# EAGLE board SpaceInvaders-v21-OtherMill (EAGLE 8.1.0)
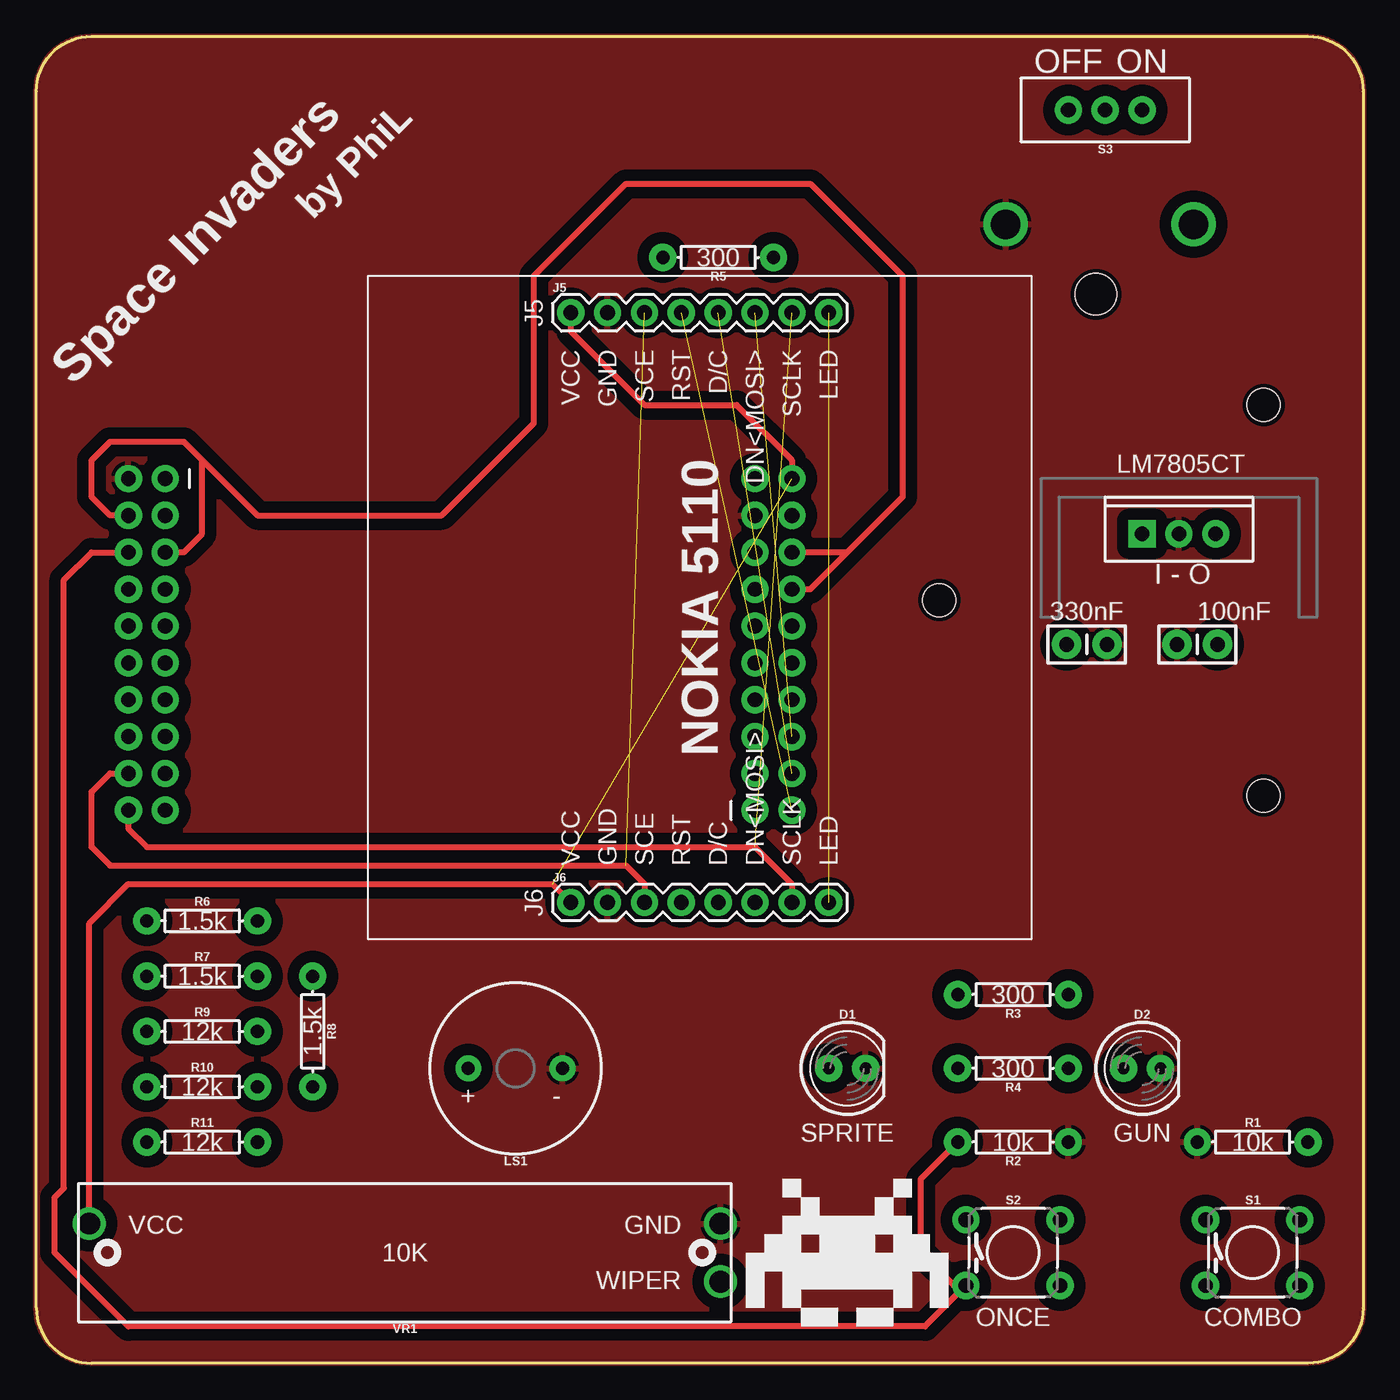
[diagram p0: board, top side]
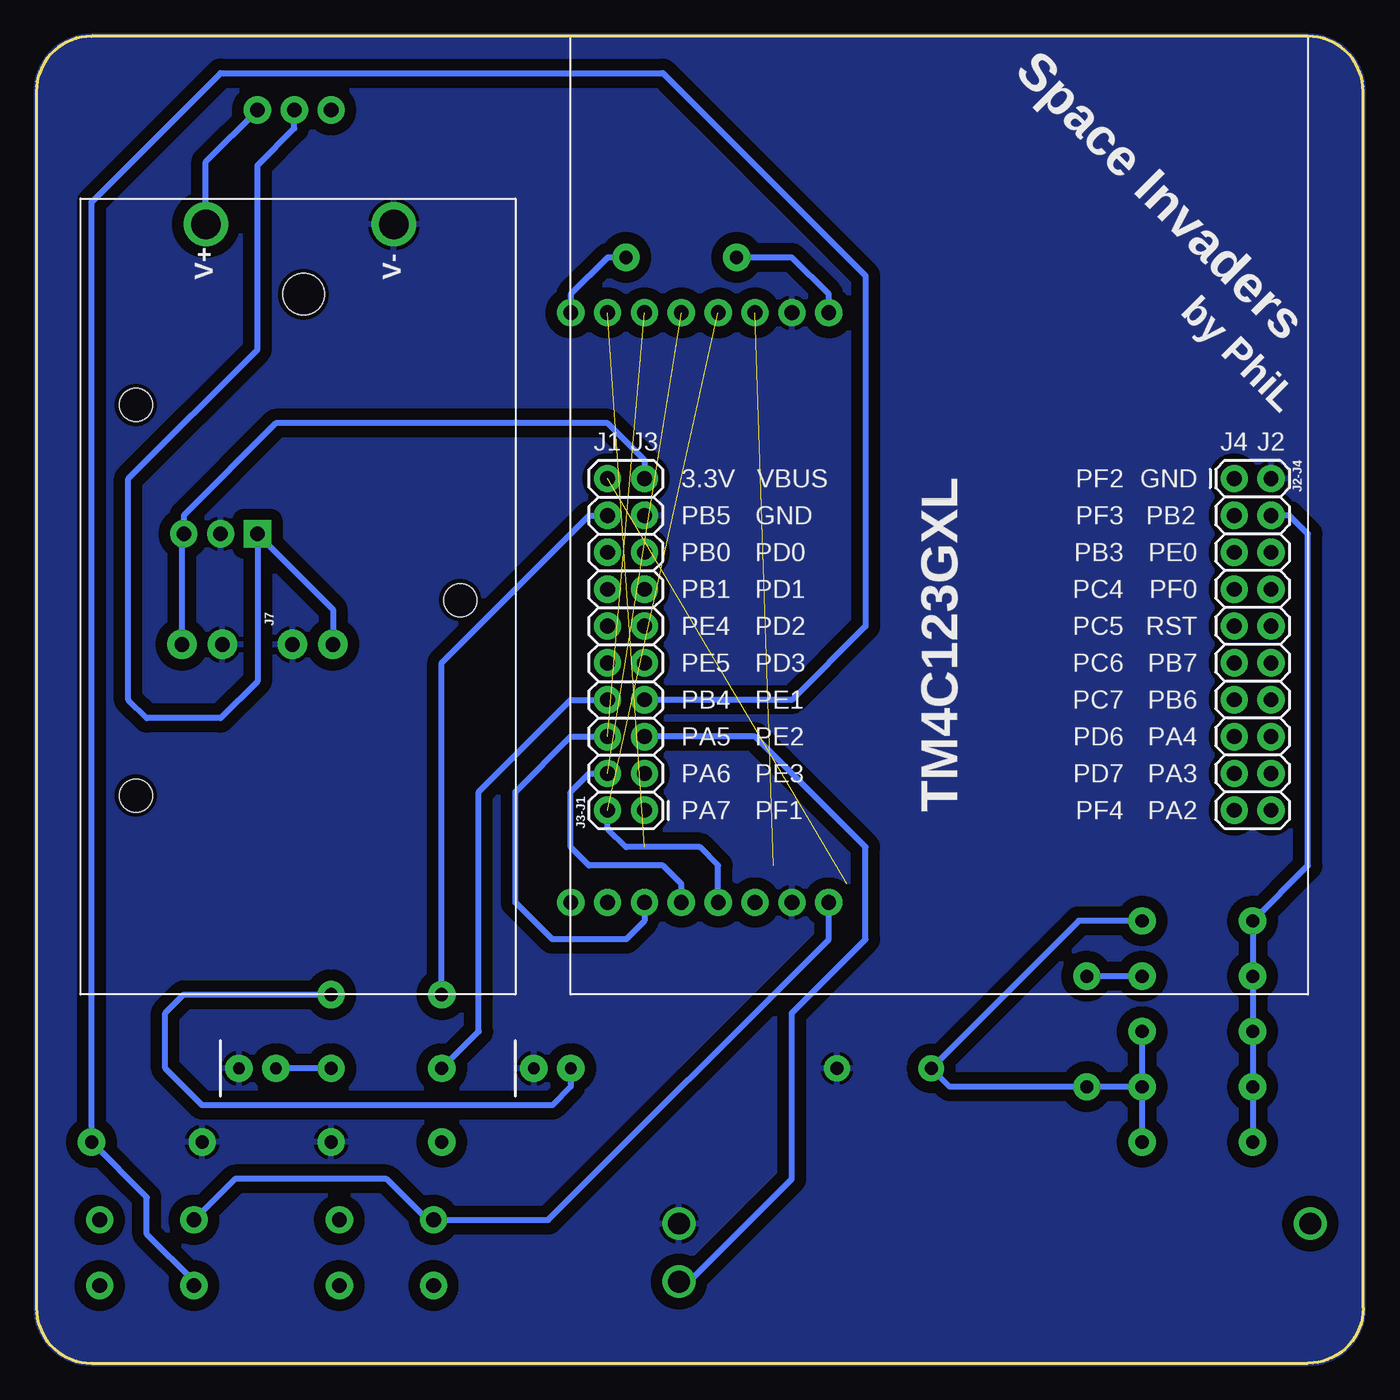
[diagram p1: board, bottom side, seen from below]

Size 91.44 x 91.44 mm. Coordinates in mm from the lower left corner, seen from the top.
Outline: 0,3.81 0,87.63 arc-90 3.81,91.44 87.63,91.44 arc-90 91.44,87.63 91.44,3.81 arc-90 87.63,0 3.81,0 arc-90 0,3.81
Copper layers (1*16): Top 0.035mm / dielectric 1.5mm / Bottom 0.035mm
Design rules "OthermillDRC_1_32_v2": minimum track width 8mil, minimum drill 0.8mm, track to track 0.794003125mm, track to pad 0.794003125mm, pad to pad 0.794003125mm, via to via 0.794003125mm, smd to smd 0mil, copper to edge 0mil, drill to drill 1mil, minimum pad ring 10mil, minimum via ring 10mil, stop-mask expansion 1mil, vias tented up to drill 30mil, thermal gap 10mil
Net classes: 0 default: width 0.406 mm
Holes 2.86 mm at 73.03,73.66

## Footprints (pad centres in the part's own frame; a part is rotated, then mirrored left to right if it is on the bottom)
CAP-PTH-SMALL-KIT = drill 1.016 pad 2.032: 1 -1.397,0; 2 1.397,0
LED_5MM = drill 0.813 pad 1.88: A -1.27,0; K 1.27,0
2X10 = drill 1.016 pad 1.88: 1 0,0; 2 0,2.54; 3 2.54,0; 4 2.54,2.54; 5 5.08,0; 6 5.08,2.54; 7 7.62,0; 8 7.62,2.54; 9 10.16,0; 10 10.16,2.54; 11 12.7,0; 12 12.7,2.54; 13 15.24,0; 14 15.24,2.54; 15 17.78,0; 16 17.78,2.54; 17 20.32,0; 18 20.32,2.54; 19 22.86,0; 20 22.86,2.54
1X08 = drill 1.016 pad 1.88: 1 0,0; 2 2.54,0; 3 5.08,0; 4 7.62,0; 5 10.16,0; 6 12.7,0; 7 15.24,0; 8 17.78,0
BC9VPC = drill 2.032: V+ 53.086,21.336; V- 53.086,8.382 | hole 2.286: 27.178,3.81; 13.716,26.162; 40.64,26.162
BUZZER-12MM = drill 0.9 pad 1.778: + 3.25,0; - -3.25,0
AXIAL-0.3 = drill 0.9 pad 1.88: P$1 -3.81,0; P$2 3.81,0
TACTILE_SWITCH_PTH_6.0MM = drill 1.016 pad 1.88: 1 -3.251,2.261; 2 3.251,2.261; 3 -3.251,-2.261; 4 3.251,-2.261
SWITCH_SPDT_PTH_11.6X4.0MM = drill 1.016 pad 1.88: 1 0,2.54; 2 0,0; 3 0,-2.54
TO220-IGO = drill 1 pad 1.88: GND 0,0; OUT 2.54,0 | drill 1 pad 1.88 square: IN -2.54,0
SLIDER-MEDIUM = drill 1.5: BOTTOM 21.75,-2; TOP -21.75,-2; WIPER -21.75,2

## Placement (x,y rotation side)
C1  100nF  [CAP-PTH-SMALL-KIT]  80.01,49.53 0 top
C2  330nF  [CAP-PTH-SMALL-KIT]  72.39,49.53 0 top
D1  RED_SPRITES  [LED_5MM]  55.88,20.32 0 top
D2  YELLOW_GUN  [LED_5MM]  76.2,20.32 0 top
FRAME1  FRAME-LETTER  [CREATIVE_COMMONS]  12.7,-7.62 0 top  (outside the outline)
J2-J4  TM4C123GXL  [2X10]  8.89,60.96 270 bottom
J3-J1  TM4C123GXL  [2X10]  49.53,38.1 90 bottom
J5  NOKIA_5110  [1X08]  36.83,72.39 0 top
J6  NOKIA_5110  [1X08]  36.83,31.75 0 top
J7  9V  [BC9VPC]  58.42,25.4 90 bottom
LS1  BUZZER  [BUZZER-12MM]  33.02,20.32 180 top
R1  10k  [AXIAL-0.3]  83.82,15.24 0 top
R2  10k  [AXIAL-0.3]  67.31,15.24 180 top
R3  300  [AXIAL-0.3]  67.31,25.4 180 top
R4  300  [AXIAL-0.3]  67.31,20.32 180 top
R5  300  [AXIAL-0.3]  46.99,76.2 180 top
R6  1.5k  [AXIAL-0.3]  11.43,30.48 0 top
R7  1.5k  [AXIAL-0.3]  11.43,26.67 0 top
R8  1.5k  [AXIAL-0.3]  19.05,22.86 270 top
R9  12k  [AXIAL-0.3]  11.43,22.86 0 top
R10  12k  [AXIAL-0.3]  11.43,19.05 0 top
R11  12k  [AXIAL-0.3]  11.43,15.24 0 top
S1  COMBO  [TACTILE_SWITCH_PTH_6.0MM]  83.82,7.62 0 top
S2  ONCE  [TACTILE_SWITCH_PTH_6.0MM]  67.31,7.62 0 top
S3  POWER_SWITCH  [SWITCH_SPDT_PTH_11.6X4.0MM]  73.66,86.36 90 top
U1  LM7805CT  [TO220-IGO]  78.74,57.15 0 top
VR1  10k  [SLIDER-MEDIUM]  25.4,7.62 180 top

## Library data of the parts
C1 C2 = SparkFun-Capacitors; PROD_ID: CAP-08370
D1 D2 = SparkFun-LED
FRAME1 = SparkFun-Aesthetics
J2-J4 J3-J1 = SparkFun-Connectors
J5 J6 = SparkFun-Connectors; PROD_ID: CONN-08438
J7 = SparkFun-Connectors; PROD_ID: BATT-10855
LS1 = SparkFun-Electromechanical; PROD_ID: COMP-08253; SF_SKU: COM-07950
R1 R2 = SparkFun-Resistors; PROD_ID: RES-09435
R3-R11 = SparkFun-Resistors; PROD_ID: RES-08380
S1 S2 = SparkFun-Switches; PROD_ID: SWCH-08441; SF_SKU: COM-00097
S3 = SparkFun-Switches; PROD_ID: SWCH-08261; SF_SKU: COM-00102
U1 = SparkFun-IC-Power
VR1 = SparkFun-Resistors; PROD_ID: RES-11931; SF_SKU: COM-11621

## Nets
3.3V: J3-J1.20 J5.1 J6.1 R5.P$2 S1.1 S2.1 VR1.BOTTOM
9V: J7.V+ S3.3
DAC: J2-J4.4 J2-J4.5 J3-J1.14 J3-J1.16 R6.P$1 R7.P$1 R9.P$1 R10.P$1 R11.P$1
DAC_OUT: LS1.+ R6.P$2 R8.P$2 R9.P$2 R10.P$2 R11.P$2
GND: C1.1 C2.2 D1.K D2.K J2-J4.2 J3-J1.17 J5.2 J6.2 J7.V- LS1.- R1.P$1 R2.P$1 U1.GND VR1.TOP
LED: J5.8 J6.8 R5.P$1
LLED: D1.A R3.P$1
N$1: R7.P$2 R8.P$1
PA2: J2-J4.20 J5.7 J6.7
PA3: J2-J4.18 J5.3 J6.3
PA4: J2-J4.16
PA5: J3-J1.6 J5.6 J6.6
PA6: J3-J1.4 J5.5 J6.5
PA7: J3-J1.2 J5.4 J6.4
PB4: J3-J1.8 R4.P$2
PB5: J3-J1.18 R3.P$2
PB6: J2-J4.14
PB7: J2-J4.12
PC4: J2-J4.7
PC5: J2-J4.9
PC6: J2-J4.11
PC7: J2-J4.13
PD0: J3-J1.15
PD1: J3-J1.13
PD2: J3-J1.11
PD3: J3-J1.9
PD6: J2-J4.15
PD7: J2-J4.17
PE0: J2-J4.6 R2.P$2 S2.3
PE1: J3-J1.7 R1.P$2 S1.3
PE2: J3-J1.5 VR1.WIPER
PE3: J3-J1.3
PE4: J3-J1.12
PE5: J3-J1.10
PF0: J2-J4.8
PF1: J3-J1.1
PF2: J2-J4.1
PF3: J2-J4.3
PF4: J2-J4.19
RESET: J2-J4.10
RLED: D2.A R4.P$1
VBUS: C1.2 J3-J1.19 U1.OUT
VIN: C2.1 S3.2 U1.IN

## Tracks (layer width: path | path; a pad name or v marks a point on that pad's centre or on a via)
3.3V  (1 unrouted)
  Top 0.406: VR1.BOTTOM 3.65,30.32 6.35,33.02 35.56,33.02 J6.1 | J5.1 36.83,71.12 41.91,66.04 48.26,66.04 52.07,62.23 J3-J1.20
  Bottom 0.406: S1.1 77.75,12.7 67.31,12.7 64.49,9.88 S2.1 56.16,9.88 36.83,29.21 J6.1 | J5.1 36.83,73.66 39.37,76.2 R5.P$2
9V
  Bottom 0.406: J7.V+ 79.76,82.8 S3.3
DAC
  Top 0.406: J2-J4.5 10.16,55.88 11.43,57.15 11.43,62.23 | 55.88,55.88 59.69,59.69 59.69,74.93 53.34,81.28 40.64,81.28 34.29,74.93 34.29,64.77 27.94,58.42 15.24,58.42 11.43,62.23 | 55.88,55.88 J3-J1.16 | J3-J1.14 53.34,53.34 55.88,55.88 | J2-J4.4 5.08,58.42 3.81,59.69 3.81,62.23 5.08,63.5 10.16,63.5 11.43,62.23
  Bottom 0.406: J2-J4.4 5.08,58.42 3.81,57.15 3.81,34.29 R6.P$1 R7.P$1 R9.P$1 R10.P$1 R11.P$1
DAC_OUT
  Bottom 0.406: R6.P$2 19.61,30.48 LS1.+ 28.5,19.05 R8.P$2 R10.P$2 | R9.P$2 R10.P$2 | R10.P$2 R11.P$2
GND
  pour Bottom (isolate 0.305): 0,3.81 0,87.63 arc-90 3.81,91.44 87.63,91.44 arc-90 91.44,87.63 91.44,3.81 arc-90 87.63,0 3.81,0 arc-90
  pour Top (isolate 0.305): 0,3.81 0,87.63 arc-90 3.81,91.44 87.63,91.44 arc-90 91.44,87.63 91.44,3.81 arc-90 87.63,0 3.81,0 arc-90
LED  (1 unrouted)
  Bottom 0.406: R5.P$1 52.07,76.2 54.61,73.66 J5.8
LLED
  Bottom 0.406: D1.A 54.61,19.05 55.88,17.78 80.01,17.78 82.55,20.32 82.55,24.13 81.28,25.4 R3.P$1
N$1
  Bottom 0.406: R7.P$2 R8.P$1
PA2  (1 unrouted)
  Top 0.406: J2-J4.20 6.35,36.83 7.62,35.56 49.53,35.56 52.07,33.02 J6.7
PA3  (1 unrouted)
  Top 0.406: J2-J4.18 5.08,40.64 3.81,39.37 3.81,35.56 5.08,34.29 40.64,34.29 41.91,33.02 J6.3
PA5  (1 unrouted)
  Bottom 0.406: J6.6 49.53,30.48 50.8,29.21 55.88,29.21 58.42,31.75 58.42,39.37 54.61,43.18 J3-J1.6
PA6  (1 unrouted)
  Bottom 0.406: J3-J1.4 53.34,40.64 54.61,39.37 54.61,35.56 53.34,34.29 48.26,34.29 46.99,33.02 J6.5
PA7  (1 unrouted)
  Bottom 0.406: J6.4 44.45,34.29 45.72,35.56 50.8,35.56 52.07,36.83 J3-J1.2
PB4
  Bottom 0.406: R4.P$2 60.96,22.86 60.96,39.37 54.61,45.72 J3-J1.8
PB5
  Bottom 0.406: R3.P$2 63.5,48.26 53.34,58.42 J3-J1.18
PE0
  Top 0.406: R2.P$2 60.96,12.7 60.96,7.62 63.22,5.36 S2.3 61.24,2.54 6.35,2.54 1.27,7.62 1.27,11.43 1.91,12.06 1.91,53.98 3.81,55.88 J2-J4.6
PE1
  Bottom 0.406: J3-J1.7 39.37,45.72 34.29,50.8 34.29,74.93 48.26,88.9 78.74,88.9 87.63,80.01 R1.P$2 83.82,11.43 83.82,8.89 80.57,5.64 S1.3
PE2
  Bottom 0.406: VR1.WIPER 46.45,5.62 39.37,12.7 39.37,24.13 34.29,29.21 34.29,35.56 41.91,43.18 J3-J1.5
RLED
  Bottom 0.406: R4.P$1 D2.A
VBUS
  Bottom 0.406: J3-J1.19 49.53,62.23 52.07,64.77 74.93,64.77 81.28,58.42 U1.OUT 81.41,57.02 C1.2
VIN
  Bottom 0.406: C2.1 70.99,51.94 U1.IN 76.2,46.99 78.74,44.45 83.82,44.45 85.09,45.72 85.09,60.96 76.2,69.85 76.2,82.55 73.66,85.09 S3.2

## Text on the board
tPlace: OFF | ON | by PhiL | 300 | J5 | VCC | GND | SCE | RST | D/C | DN<MOSI> | SCLK | LED | Space Invaders | LM7805CT | I - O | NOKIA 5110 | 330nF | 100nF | VCC | GND | SCE | RST | D/C | DN<MOSI> | SCLK | LED | J6 | 1.5k | 1.5k | 300 | 12k | 1.5k | 300 | 12k | + | - | 12k | SPRITE | 10k | GUN | 10k | VCC | GND | 10K | WIPER | ONCE | COMBO
bPlace: Space Invaders | by PhiL | J2 | J4 | J3 | J1 | GND | PF2 | VBUS | 3.3V | PB2 | PF3 | GND | PB5 | PE0 | PB3 | PD0 | PB0 | PF0 | PC4 | PD1 | PB1 | RST | PC5 | PD2 | PE4 | TM4C123GXL | PB7 | PC6 | PD3 | PE5 | PB6 | PC7 | PE1 | PB4 | PA4 | PD6 | PE2 | PA5 | PA3 | PD7 | PE3 | PA6 | PA2 | PF4 | PF1 | PA7
tDocu: Phi Luu